# EAGLE board Leds (EAGLE 5.11)
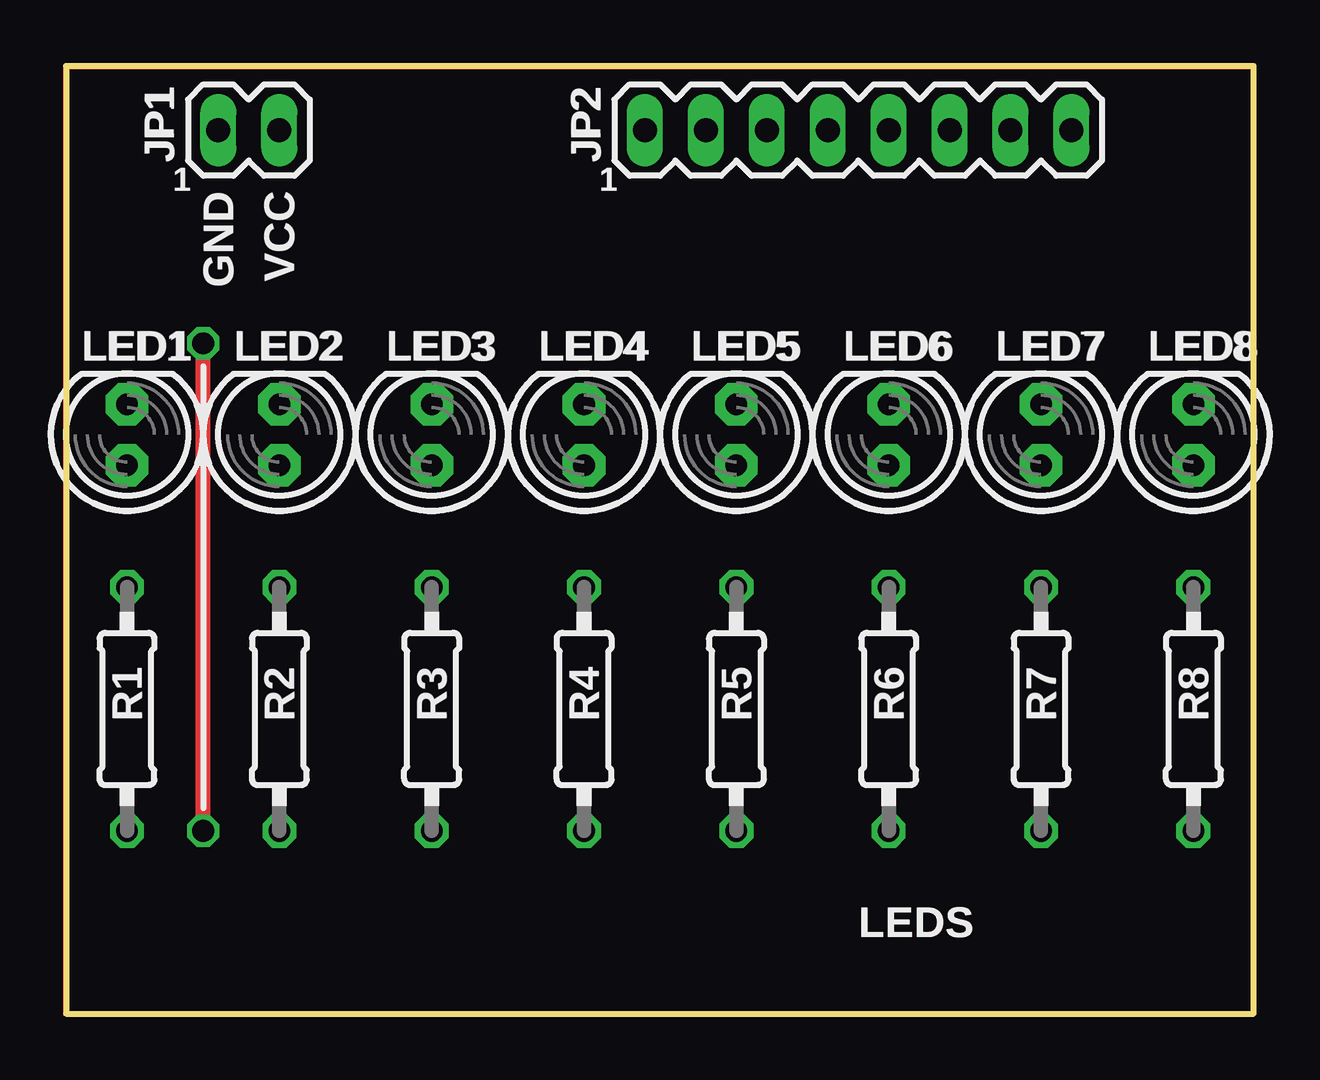
[diagram p0: board, top side]
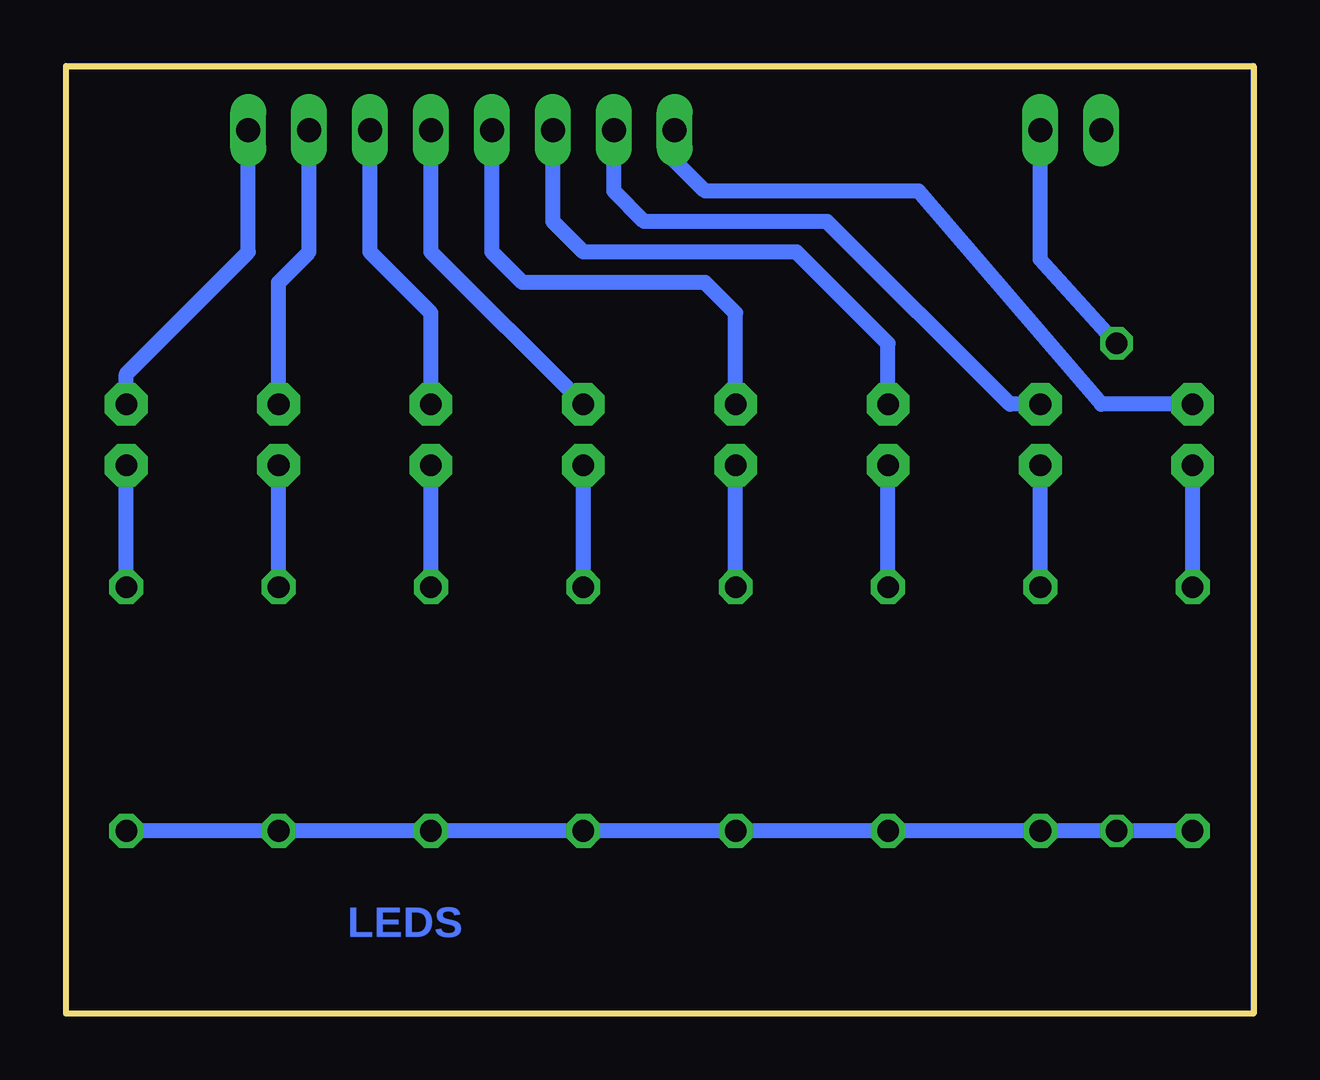
[diagram p1: board, bottom side, seen from below]

Size 49.5 x 39.5 mm. Coordinates in mm from the lower left corner, seen from the top.
Outline: 0,0 49.5,0 49.5,39.5 0,39.5 0,0
Copper layers (1*16): Top 0.035mm / dielectric 1.5mm / Bottom 0.035mm
Design rules "10mils_drill35": minimum track width 10mil, minimum drill 35mil, track to track 10mil, track to pad 10mil, pad to pad 10mil, via to via 10mil, smd to smd 10mil, copper to edge 40mil, drill to drill 10mil, minimum pad ring 10mil, minimum via ring 8mil, stop-mask expansion 0mil, vias tented up to drill 0mil, thermal gap 10mil
Net classes: 0 default: width 0.381 mm, drill 0.9 mm, clearance 0.254 mm; 1 GND: width 0.254 mm, drill 0.9 mm, clearance 0.254 mm to class 0, clearance 0.254 mm; 2 Border: width 0.254 mm, drill 0.9 mm, clearance 0.254 mm to class 0, clearance 0.254 mm to class 1, clearance 0.254 mm; 3 VCC: width 0.635 mm, drill 0.9 mm, clearance 0.254 mm to class 0, clearance 0.254 mm to class 1, clearance 0.254 mm to class 2, clearance 0.254 mm

## Footprints (pad centres in the part's own frame; a part is rotated, then mirrored left to right if it is on the bottom)
1X02 = drill 1 long: 1 0,0; 2 2.54,0
1X08 = drill 1 long: 1 0,0; 2 2.54,0; 3 5.08,0; 4 7.62,0; 5 10.16,0; 6 12.7,0; 7 15.24,0; 8 17.78,0
LED5MM = drill 0.9 pad 1.778 octagon: A -1.27,0; K 1.27,0
0207/10 = drill 0.9 octagon: 1 -5.08,0; 2 5.08,0

## Placement (x,y rotation side)
JP1  [1X02]  6.35,36.83 0 top
JP2  [1X08]  24.13,36.83 0 top
LED1  [LED5MM]  2.54,24.13 90 top
LED2  [LED5MM]  8.89,24.13 90 top
LED3  [LED5MM]  15.24,24.13 90 top
LED4  [LED5MM]  21.59,24.13 90 top
LED5  [LED5MM]  27.94,24.13 90 top
LED6  [LED5MM]  34.29,24.13 90 top
LED7  [LED5MM]  40.64,24.13 90 top
LED8  [LED5MM]  46.99,24.13 90 top
R1  560  [0207/10]  2.54,12.7 270 top
R2  560  [0207/10]  8.89,12.7 270 top
R3  560  [0207/10]  15.24,12.7 270 top
R4  560  [0207/10]  21.59,12.7 270 top
R5  560  [0207/10]  27.94,12.7 270 top
R6  560  [0207/10]  34.29,12.7 270 top
R7  560  [0207/10]  40.64,12.7 270 top
R8  560  [0207/10]  46.99,12.7 270 top

## Library data of the parts
JP1 JP2 LED1-LED8 R1-R8 = MyLibrary

## Nets
GND [GND]: JP1.1
N$1: LED1.A R1.1
N$2: LED2.A R2.1
N$3: LED3.A R3.1
N$4: LED4.A R4.1
N$5: LED5.A R5.1
N$7: LED6.A R6.1
N$8: LED7.A R7.1
N$9: LED8.A R8.1
N$10: JP2.1 LED1.K
N$11: JP2.2 LED2.K
N$12: JP2.3 LED3.K
N$13: JP2.4 LED4.K
N$14: JP2.5 LED5.K
N$15: JP2.6 LED6.K
N$16: JP2.7 LED7.K
N$17: JP2.8 LED8.K
VCC [VCC]: JP1.2 R1.2 R2.2 R3.2 R4.2 R5.2 R6.2 R7.2 R8.2

## Tracks (layer width: path | path; a pad name or v marks a point on that pad's centre or on a via)
N$1
  Bottom 0.635: R1.1 LED1.A
N$2
  Bottom 0.635: R2.1 LED2.A
N$3
  Bottom 0.635: R3.1 LED3.A
N$4
  Bottom 0.635: R4.1 LED4.A
N$5
  Bottom 0.635: R5.1 LED5.A
N$6
  Bottom 0.254: 0,0 0,39.5 49.5,39.5 49.5,0 0,0
N$7
  Bottom 0.635: R6.1 LED6.A
N$8
  Bottom 0.635: R7.1 LED7.A
N$9
  Bottom 0.635: R8.1 LED8.A
N$10
  Bottom 0.635: LED1.K 6.35,25.4 13.97,34.29 22.86,34.29 24.13,35.56 JP2.1
N$11
  Bottom 0.635: LED2.K 10.16,25.4 17.78,33.02 25.4,33.02 26.67,34.29 JP2.2
N$12
  Bottom 0.635: LED3.K 15.24,27.94 19.05,31.75 27.94,31.75 29.21,33.02 JP2.3
N$13
  Bottom 0.635: LED4.K 21.59,29.21 22.86,30.48 30.48,30.48 31.75,31.75 JP2.4
N$14
  Bottom 0.635: LED5.K 34.29,31.75 JP2.5
N$15
  Bottom 0.635: LED6.K 34.29,29.21 36.83,31.75 JP2.6
N$16
  Bottom 0.635: LED7.K 40.64,30.48 39.37,31.75 JP2.7
N$17
  Bottom 0.635: LED8.K 46.99,26.67 41.91,31.75 JP2.8
N$18
  Top 0.254: 0,0 0,39.5 49.5,39.5 49.5,0 0,0
VCC  (via drill 0.9)
  Top 0.635: v5.71,7.62 v5.71,27.94
  Bottom 0.635: JP1.2 8.89,31.43 v5.71,27.94 | R1.2 v5.71,7.62 R2.2 R3.2 R4.2 R5.2 R6.2 R7.2 R8.2

## Text on the board
Top: LEDS
Bottom: LEDS
tNames: GND | VCC | LEDS
_tsilk: JP1 | JP2 | 1 | GND | VCC | 1 | LED1 | LED2 | LED3 | LED4 | LED5 | LED6 | LED7 | LED8 | R1 | R2 | R3 | R4 | R5 | R6 | R7 | R8 | LEDS
Contour: LEDS